# Altium PCB PCB_Final.PcbDoc (part 1 of 2)
Units mm, origin at the board's own origin, x right, y up, seen from the top; angles counter-clockwise.
Board outline 170 x 130 mm, 2 copper layers (Top Layer, Bottom Layer); 113 components, 88 nets, 409 pads, 43 vias.
Unrouted connection lines stored in the file: 10.
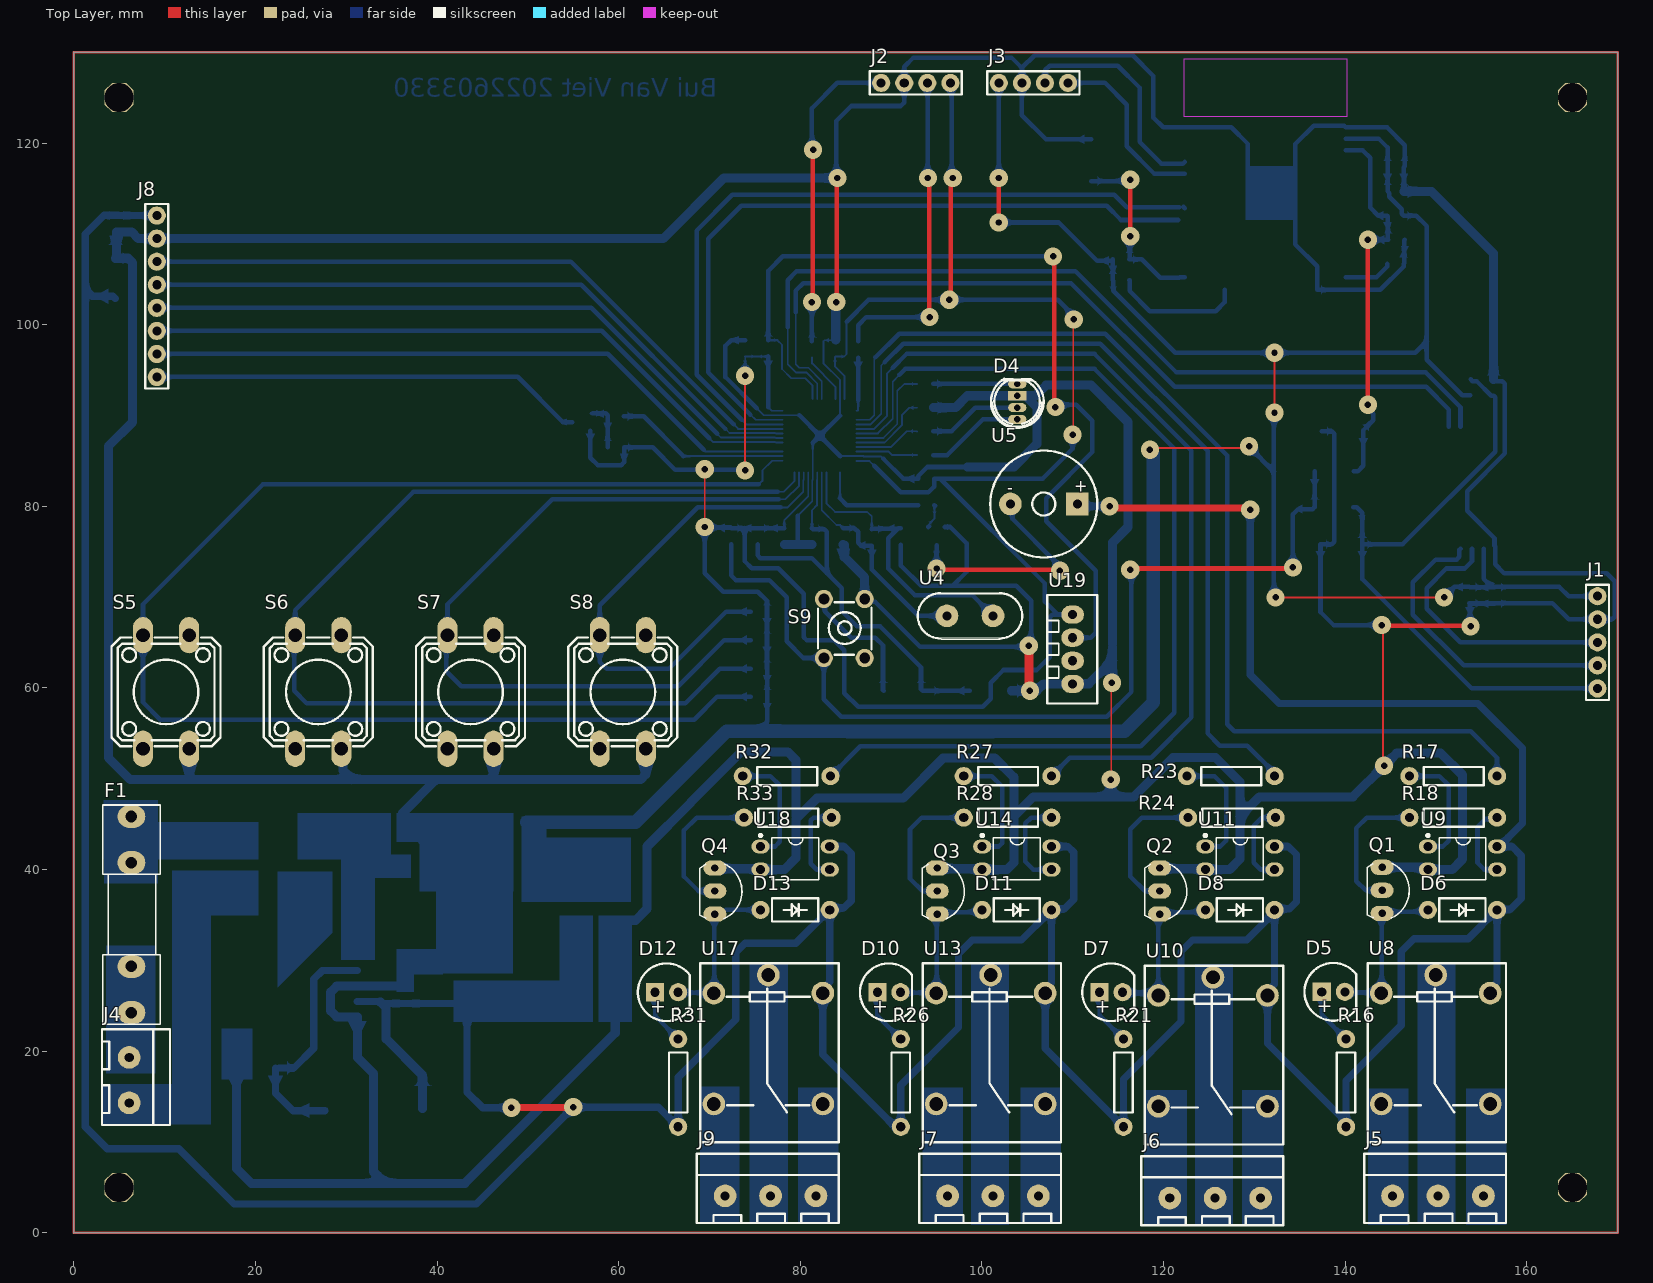
[diagram p0: Top Layer view]
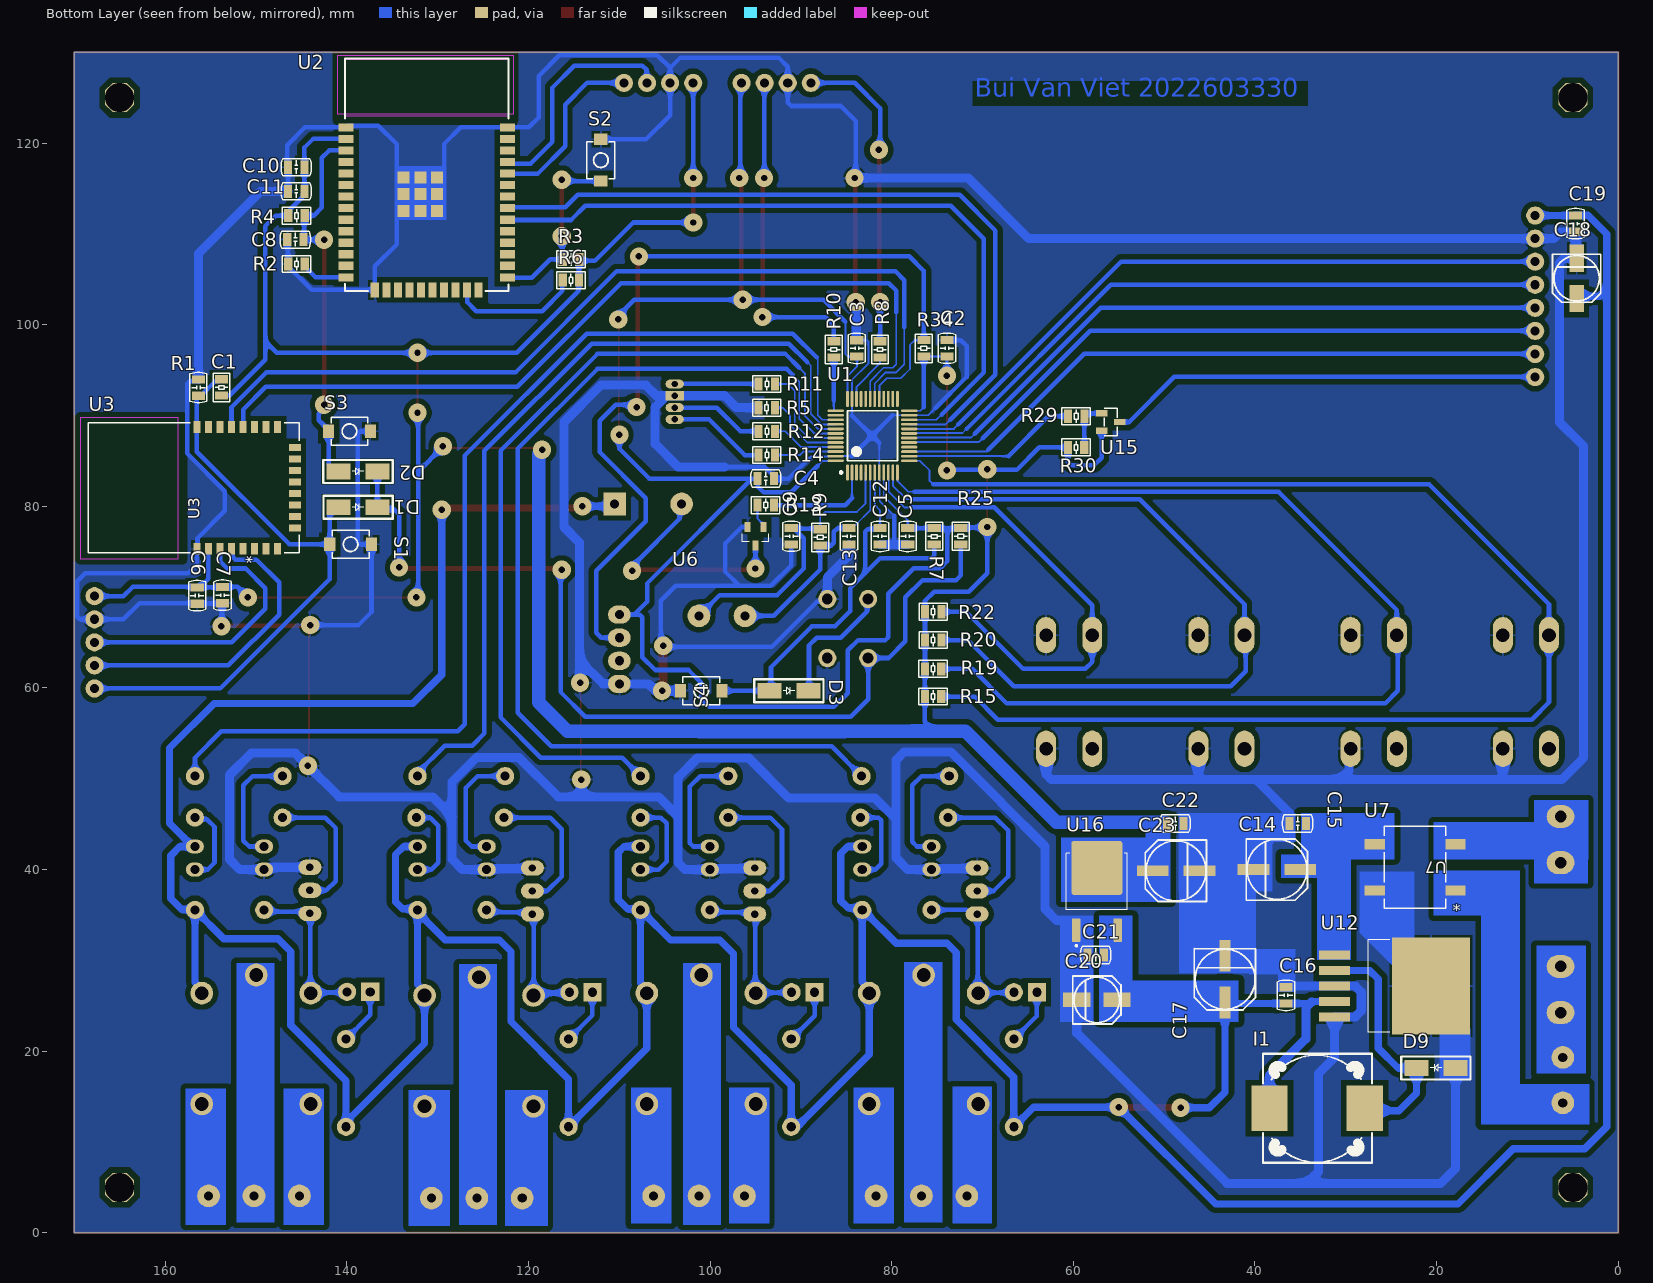
[diagram p1: Bottom Layer view, seen from below]
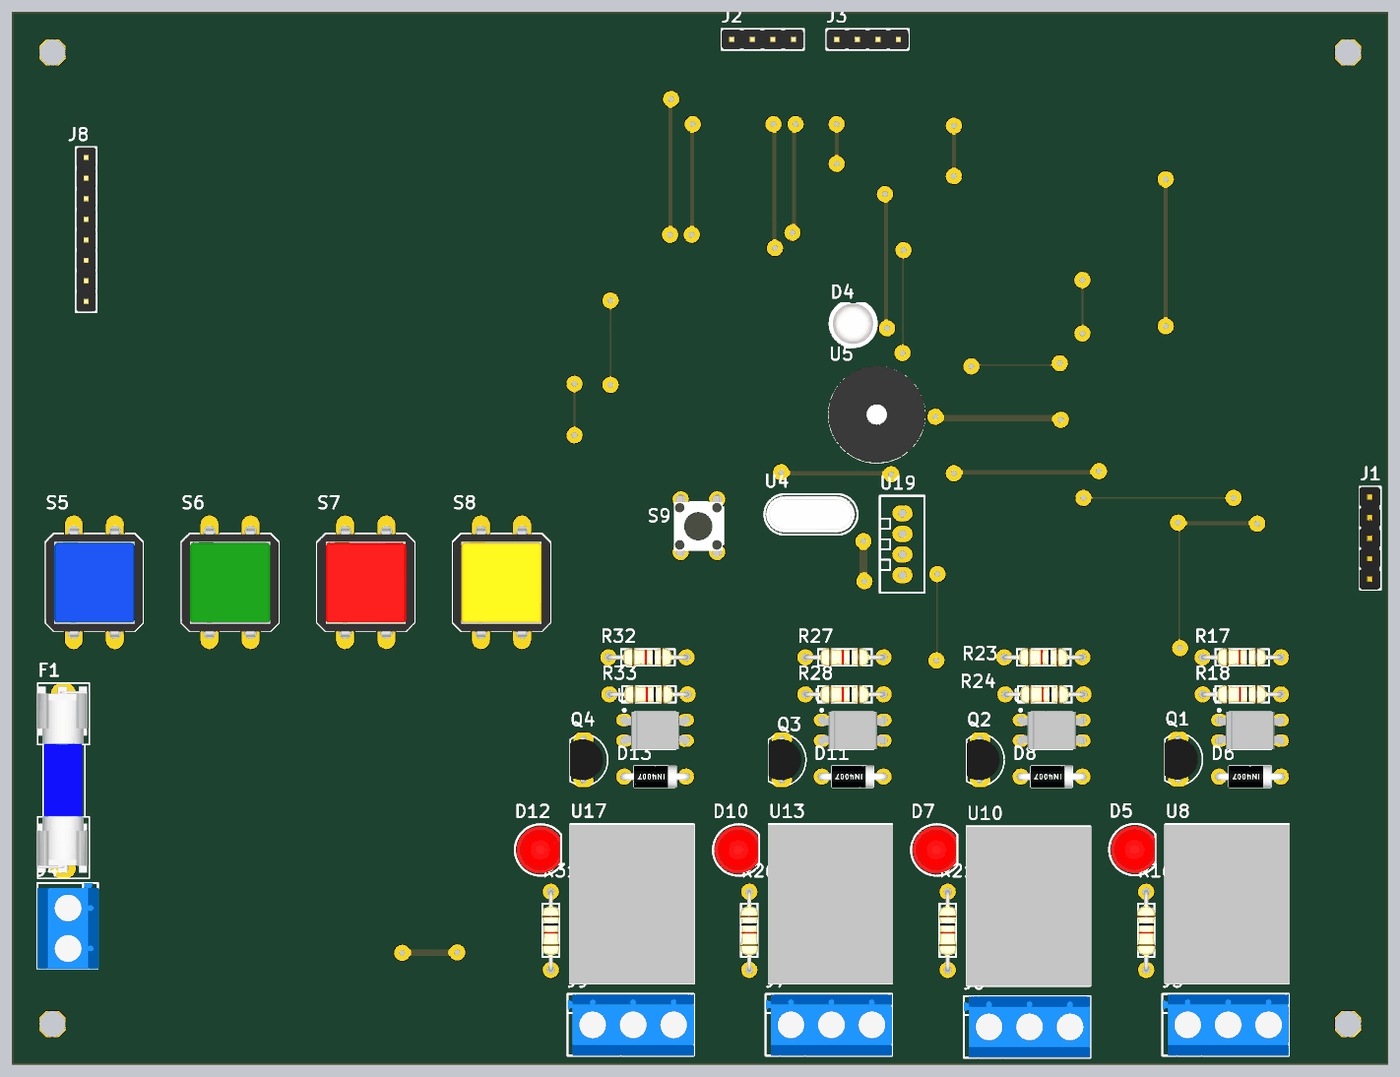
[diagram p2: 3D render of the assembled board from above, using the file's embedded part models]
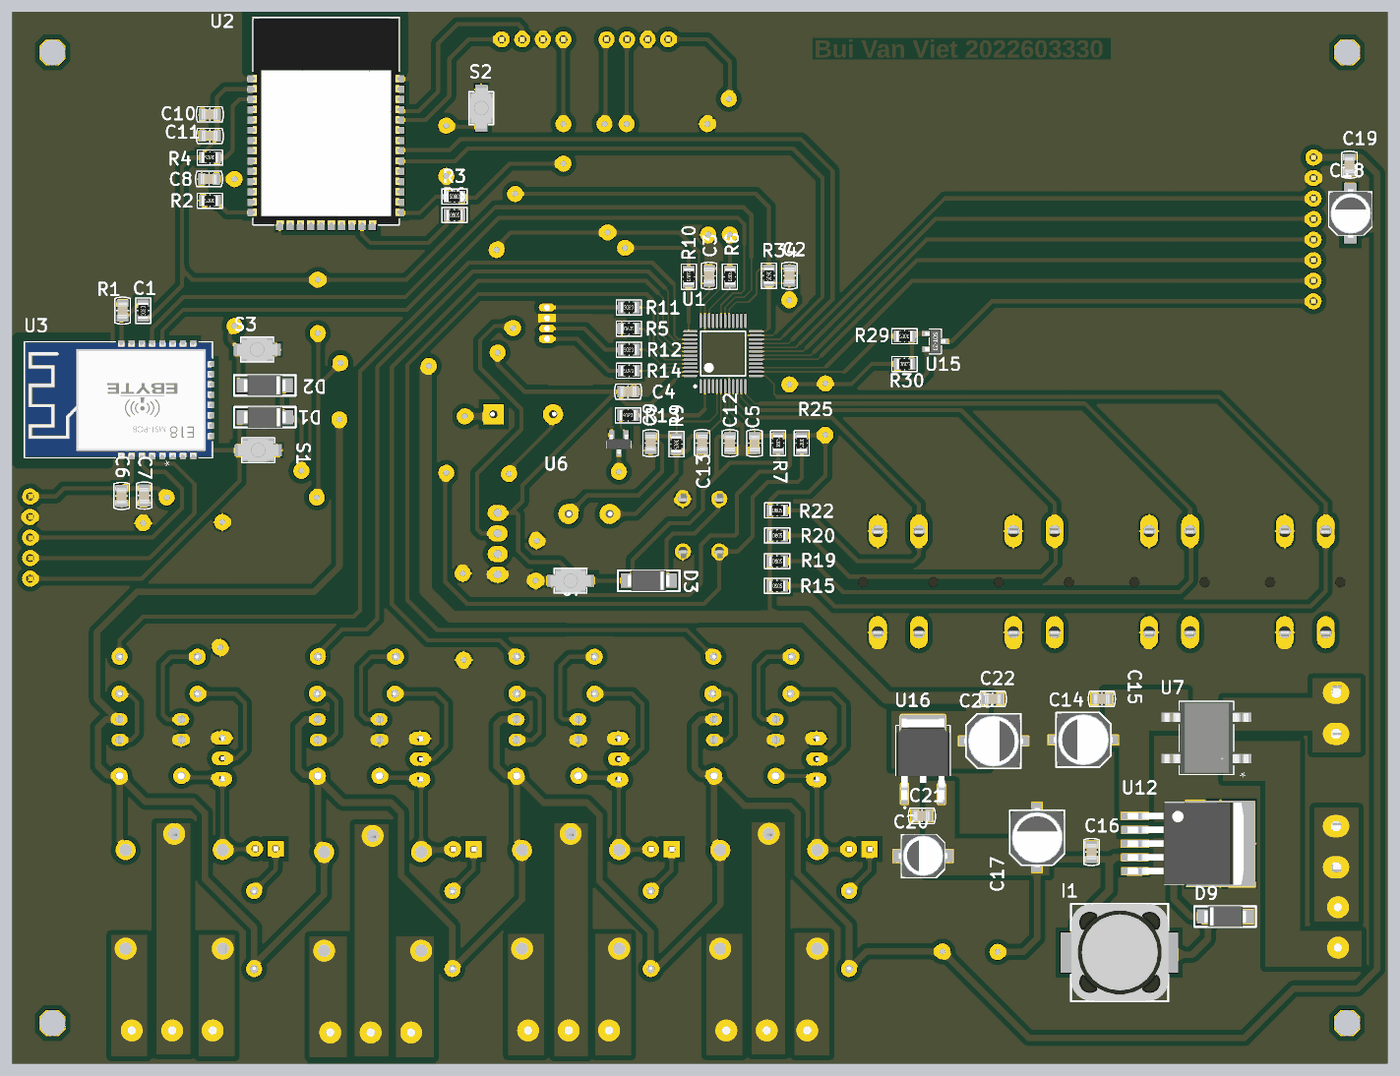
[diagram p3: 3D render of the assembled board from below, using the file's embedded part models]

## Layer stack, top to bottom
Top Solder: solder mask 0.0102, Solder Resist, Dk 3.5
Top Layer: signal copper 0.0356
Dielectric 1: dielectric 0.32, FR-4, Dk 4.8
Bottom Layer: signal copper 0.0356
Bottom Solder: solder mask 0.0102, Solder Resist, Dk 3.5

## Board outline
0,0 0,130 170,130 170,0

## Design rules (kind name [scope] priority, off if disabled: settings)
Clearance [All] p1: gap=0.2 ignorepadtopadclearanceinfootprint=FALSE except(0.6: Arc-Fill Arc-Poly Arc-Region Track-Fill Track-Poly Track-Region SMDPad-Fill SMDPad-Poly SMDPad-Region THPad-Fill THPad-Poly THPad-Region Via-Fill Via-Poly Via-Region Fill-Fill Fill-Poly Fill-Region Poly-Poly Poly-Region Region-Region)
PolygonConnect [All] p1: connectstyle=Relief reliefconductorwidth=0.254 reliefentries=4 polygonreliefangle="90 Angle" airgapwidth=0.254
RoutingVias [All] p1: holewidth=0.711 width=2 viastyle="Through Hole" minholewidth=0.711 minwidth=2 maxholewidth=0.711 maxwidth=2
SolderMaskExpansion [All] p1: expansion=0.102 istentingtop=FALSE
SupplyNets "Schematic Supply Nets_3" [InNet('+12')] p1: voltage=0.000
SupplyNets "Schematic Supply Nets_2" [InNet('+3.3')] p2: voltage=0.000
SupplyNets "Schematic Supply Nets_1" [InNet('GND')] p3: voltage=0.000
SupplyNets "Schematic Supply Nets" [InNet('+5')] p4: voltage=0.000
Width GND [InNet('GND')] p1: maxlimit=1 minlimit=0.2 preferedwidth=0.2
Width 12V [InNet('+12')] p2: maxlimit=1 minlimit=1 preferedwidth=1
Width 5V [InNet('+5')] p3: maxlimit=1 minlimit=0.8 preferedwidth=0.8
Width 3.3V [InNet('+3.3')] p4: maxlimit=1.5 minlimit=0.2 preferedwidth=0.5
Width SIG [All] p5: maxlimit=0.5 minlimit=0.2 preferedwidth=0.2
30 further rules are at their usual default settings.

## Components (designator, comment, footprint, x,y, rotation, side; value= is the part's Value field where it differs from the comment)
C1 "100nF" "CAPACITOR 0805" 156.337,93.08 r270 bottom
C2 "100nF" "CAPACITOR 0805" 73.914,97.398 r270 bottom
C3 "100nF" "CAPACITOR 0805" 83.844,97.389 r270 bottom
C4 "100nF" "CAPACITOR 0805" 93.864,83.058 r0 bottom
C5 "100nF" "CAPACITOR 0805" 78.232,76.697 r90 bottom
C6 "100nF" "CAPACITOR 0805" 156.464,70.176 r90 bottom
C7 "10uF" "CAPACITOR 0805" 153.67,70.22 r90 bottom
C8 "100nF" "CAPACITOR 0805" 145.649,109.363 r180 bottom
C9 "100nF" "CAPACITOR 0805" 91.059,76.697 r270 bottom
C10 "100nF" "CAPACITOR 0805" 145.552,117.343 r180 bottom
C11 "10uF" "CAPACITOR 0805" 145.552,114.681 r180 bottom
C12 "CAPACITOR 0805" "CAPACITOR 0805" 81.28,76.697 r90 bottom
C13 "100nF" "CAPACITOR 0805" 84.709,76.697 r270 bottom
C14 "220uF/16V" ALUMINUM_7mm 37.592,40.005 r270 bottom
C15 "100nF" "CAPACITOR 0805" 35.295,45.085 r180 bottom
C16 "100nF" "CAPACITOR 0805" 36.576,26.151 r270 bottom
C17 "220uF" ALUMINUM_7mm 43.307,27.94 r0 bottom
C18 "47uF" ALUMINUM_5mm 4.572,105.102 r0 bottom
C19 "100nF" "CAPACITOR 0805" 4.699,111.125 r90 bottom
C20 "47uF" ALUMINUM_5mm 57.404,25.654 r270 bottom
C21 "100nF" "CAPACITOR 0805" 57.531,30.607 r180 bottom
C22 "100nF" "CAPACITOR 0805" 48.779,45.085 r0 bottom
C23 "220uF" ALUMINUM_7mm 48.681,39.878 r90 bottom
D1 "M7" DIODE_SMA 138.749,79.901 r270 bottom
D2 "M7" DIODE_SMA 138.767,83.838 r270 bottom
D3 "M7" DIODE_SMA 91.313,59.69 r270 bottom
D4 "LED_RGB" LED_RGB_5mm 103.886,91.522 r270 top
D5 "LED_5mm_RED" LED_5mm_RED 138.684,26.543 r0 top
D6 "1N4007" 1N4007 152.896,35.56 r270 top
D7 "LED_5mm_RED" LED_5mm_RED 114.215,26.498 r0 top
D8 "1N4007" 1N4007 128.397,35.56 r270 top
D9 "SS34" DIODE_SMA 20.057,18.161 r90 bottom
D10 "LED_5mm_RED" LED_5mm_RED 89.747,26.498 r0 top
D11 "1N4007" 1N4007 103.833,35.56 r270 top
D12 "LED_5mm_RED" LED_5mm_RED 65.278,26.498 r0 top
D13 "1N4007" 1N4007 79.427,35.56 r270 top
F1 "F1A" Fuse 6.35,35.052 r90 top value=Fuse
I1 "1260" 1260 33.147,13.716 r0 bottom
J1 "CC DEBUGGER" MALE-2.54-5P 167.767,65.024 r0 top
J2 "ST LINK" MALE-2.54-4P 92.71,126.619 r270 top
J3 "USB TTL" MALE-2.54-4P 105.664,126.619 r90 top
J4 "12AC" BORNE-5.00-2P 6.858,17.145 r180 top
J5 "BORNE-5.00-3P" BORNE-5.00-3P 149.892,4.897 r270 top
J6 "BORNE-5.00-3P" BORNE-5.00-3P 125.36,4.643 r270 top
J7 "BORNE-5.00-3P" BORNE-5.00-3P 100.891,4.897 r270 top
J8 "TFT 2.8inh" MALE-2.54-8P 9.144,103.124 r180 top
J9 "BORNE-5.00-3P" BORNE-5.00-3P 76.401,4.897 r270 top
Q1 "C9014" QTO-92 144.054,37.719 r270 top
Q2 "C9014" QTO-92 119.564,37.643 r270 top
Q3 "C9014" QTO-92 95.074,37.643 r270 top
Q4 "C9014" QTO-92 70.584,37.643 r270 top
R1 "RESISTOR_0805" RESISTOR_0805 153.797,93.091 r270 bottom
R2 "10K" RESISTOR_0805 145.531,106.68 r0 bottom
R3 "10K" RESISTOR_0805 115.305,107.188 r0 bottom
R4 "RESISTOR_0805" RESISTOR_0805 145.531,112.004 r0 bottom
R5 "RESISTOR_0805" RESISTOR_0805 93.759,90.86 r180 bottom
R6 "10K" RESISTOR_0805 115.316,104.902 r180 bottom
R7 "RESISTOR_0805" RESISTOR_0805 75.311,76.697 r90 bottom
R8 "33" RESISTOR_0805 81.28,97.271 r90 bottom
R9 "RESISTOR_0805" RESISTOR_0805 87.867,76.582 r270 bottom
R10 "33" RESISTOR_0805 86.36,97.271 r90 bottom
R11 "220" RESISTOR_0805 93.746,93.472 r0 bottom
R12 "220" RESISTOR_0805 93.746,88.254 r0 bottom
R13 "1K" RESISTOR_0805 93.864,80.137 r0 bottom
R14 "220" RESISTOR_0805 93.746,85.646 r0 bottom
R15 "RESISTOR_0805" RESISTOR_0805 75.438,59.055 r180 bottom
R16 "220" RESISTOR_PTH_9.5mm 140.081,16.51 r270 top
R17 "1K" RESISTOR_PTH_9.5mm 151.88,50.292 r180 top
R18 "1K" RESISTOR_PTH_9.5mm 151.892,45.72 r180 top
R19 "RESISTOR_0805" RESISTOR_0805 75.438,62.103 r180 bottom
R20 "RESISTOR_0805" RESISTOR_0805 75.427,65.278 r180 bottom
R21 "220" RESISTOR_PTH_9.5mm 115.57,16.51 r270 top
R22 "RESISTOR_0805" RESISTOR_0805 75.427,68.389 r180 bottom
R23 "1K" RESISTOR_PTH_9.5mm 127.381,50.292 r180 top
R24 "1K" RESISTOR_PTH_9.5mm 127.508,45.72 r180 top
R25 "RESISTOR_0805" RESISTOR_0805 72.39,76.708 r270 bottom
R26 "220" RESISTOR_PTH_9.5mm 91.059,16.51 r270 top
R27 "1K" RESISTOR_PTH_9.5mm 102.817,50.292 r180 top
R28 "1K" RESISTOR_PTH_9.5mm 102.817,45.72 r180 top
R29 "220" RESISTOR_0805 59.679,89.916 r0 bottom
R30 "10K" RESISTOR_0805 59.69,86.487 r180 bottom
R31 "220" RESISTOR_PTH_9.5mm 66.548,16.51 r270 top
R32 "1K" RESISTOR_PTH_9.5mm 78.486,50.292 r180 top
R33 "1K" RESISTOR_PTH_9.5mm 78.613,45.72 r180 top
R34 "10K" RESISTOR_0805 76.454,97.398 r270 bottom
S1 "PUSH_BUTTON_SMD_3X4X2" PUSH_BUTTON_SMD_3X4X2 139.573,75.819 r0 bottom
S2 "PUSH_BUTTON_SMD_3X4X2" PUSH_BUTTON_SMD_3X4X2 112.014,118.11 r90 bottom
S3 "PUSH_BUTTON_SMD_3X4X2" PUSH_BUTTON_SMD_3X4X2 139.7,88.265 r0 bottom
S4 "PUSH_BUTTON_SMD_3X4X2" PUSH_BUTTON_SMD_3X4X2 100.965,59.69 r180 bottom
S5 "PUSH_BUTTON_12X12" PUSH_BUTTON_12X12_BLUE 10.16,59.563 r90 top
S6 "PUSH_BUTTON_12X12" PUSH_BUTTON_12X12_GREEN 26.924,59.563 r90 top
S7 "PUSH_BUTTON_12X12" PUSH_BUTTON_12X12_RED 43.688,59.563 r90 top
S8 "PUSH_BUTTON_12X12" PUSH_BUTTON_12X12_YELLOW 60.452,59.563 r90 top
S9 "PUSH_BUTTON_6X6" PUSH_BUTTON_6X6 84.836,66.548 r270 top
U1 "STM32F103C8T6" STM-LQFP48_N 82.116,87.775 r90 bottom
U2 "ESP32-WROOM-32D" ESP32-WROOM-32D 131.187,112.779 r180 bottom
U3 "E18-MS1-PCB" E18-MS1-PCB_BYT 156.845,82.042 r90 bottom
U4 "8 MHz" CRISTAL_16Mhz 98.679,67.945 r0 top
U5 "BUZZER" BUZZER_12mm 106.812,80.264 r0 top
U6 "J3Y" J3Y 94.996,76.708 r0 bottom
U7 "DB107S" SOIC_B107S_RTN 22.365,40.249 r0 bottom
U8 "RELE" RELE 150.082,19.83 r270 top
U9 "PC817" PC817_DIP 152.908,41.272 r270 top
U10 "RELE" RELE 125.55,19.576 r270 top
U11 "PC817" PC817_DIP 128.397,41.272 r270 top
U12 "LM2596" LM2596 24.892,27.178 r0 bottom
U13 "RELE" RELE 101.081,19.83 r270 top
U14 "PC817" PC817_DIP 103.833,41.272 r270 top
U15 "AP3P080N" SOT23-3 55.88,89.281 r0 bottom
U16 "AMS1117 TO-252" DPAK457P1010X238-3N 57.404,37.592 r180 bottom
U17 "RELE" RELE 76.592,19.83 r270 top
U18 "PC817" PC817_DIP 79.427,41.272 r270 top
U19 "DHT11" DHT11 109.982,64.262 r180 top

## Footprints (in the part's own frame and the unit in brackets; to place one, negate y for a bottom-side part, rotate by r counter-clockwise, add the part's x,y. Pads: shape width x height; smd on the part's side, far side on the other; paste and mask are expansions set on the pad)
1N4007 [mm] "Rectifier Diode 1000V 1A DO-41"
  round 2 hole 1: 1(0,-3.81) 2(0,3.81)
  silkscreen extent -1.27,-2.54 1.27,2.54, body extent -1.35,-4.24 1.35,4.24, height 3.35
1260 [mm]
  rect 4x5 smd: 1(-5.25,0) 2(5.25,0)
  silkscreen extent -6.04,-6 5.96,6, body extent -6.07,-6.02 5.93,5.98, height 7.46
ALUMINUM_5mm [mm] "ALUMINUM CAPACITOR 5mm"
  rect 1.6x3 smd: 1(0,2.213) 2(0,-2.213)
  silkscreen extent -2.64,-2.66 2.66,2.64, body extent -2.67,-2.99 2.63,3.01, height 5.81
ALUMINUM_7mm [mm] "ALUMINUM CAPACITOR 7mm"
  rect 1.2x3.5 smd: 1(0,2.58) 2(0,-2.58)
  silkscreen extent -3.38,-3.36 3.38,3.4, body extent -3.32,-3.64 3.28,3.66, height 5.8
BORNE-5.00-2P [mm]
  round 2.5 hole 1: 1(0.754,2.82) 2(0.754,-2.18)
  silkscreen extent -3.75,-5.27 3.75,5.27, body extent -3.86,-5.28 3.74,5.32, height 10.1
BORNE-5.00-3P [mm]
  round 2.5 hole 1: 1(0.815,5.318) 2(0.815,0.318) 3(0.815,-4.683)
  silkscreen extent -3.8,-7.81 3.8,7.81, body extent -3.8,-7.79 3.8,7.81, height 10.1
BUZZER_12mm [mm] "BUZZER MAGNETIC 12MM"
  rect 2.5x2.5 hole 1: 1(3.688,0)
  round 2.5 hole 1: 2(-3.688,0)
  silkscreen extent -5.9,-5.9 5.89,5.88, body extent -6,-5.98 5.99,6.02, height 9.51
"CAPACITOR 0805" [mm]
  rect 0.9x1.45 smd: 1(-0.9,0) 2(0.9,0)
  silkscreen extent -1.68,-0.95 1.67,0.95, body extent -1.03,-0.62 0.97,0.63, height 0.61
CRISTAL_16Mhz [mm] "CRYSTAL 16MHZ PTH"
  round 2.5 hole 1: 1(-2.54,0) 2(2.54,0)
  silkscreen extent -5.75,-2.56 5.75,2.56, body extent -5.56,-2.24 5.44,2.26, height 3.55
DHT11 [mm] "SENSOR HUMIDITY/TEMPERATURE"
  oval 2.5x2 hole 1: 1(0,-3.81) 2(0,-1.27) 3(0,1.27) 4(0,3.81)
  silkscreen extent -2.71,-5.97 2.79,5.97, body extent -2.71,-6 2.79,6, height 15.5
DIODE_SMA [mm] "Diode SMA"
  rect 1.75x2.65 smd: 1(0,-2.15) 2(0,2.15)
  silkscreen extent -1.27,-3.8 1.27,3.82, body extent -1.3,-2.6 1.3,2.6, height 2.2
DPAK457P1010X238-3N [mm]
  rrect25% 0.95x2.59 smd: 1(-2.286,-4.26) 3(2.286,-4.26)
  rrect10% 5.63x5.94 smd: 2(0,2.59)
  silkscreen extent -3.35,-6.07 3.35,4.19, body extent -3.3,-5.05 3.3,5.05, height 2.2
E18-MS1-PCB_BYT [mil]
  rect 51x30 smd paste+0 mask+0: 1(-264,-13.78) 2(-264,-63.78) 3(-264,-113.78) 4(-264,-163.78) 5(-264,-213.78) 6(-264,-263.78) 7(-264,-313.78) 8(-264,-363.78) 17(264,-363.78) 18(264,-313.78) 19(264,-263.78) 20(264,-213.78) 21(264,-163.78) 22(264,-113.78) 23(264,-63.78) 24(264,-13.78)
  rect 30x51 smd paste+0 mask+0: 9(-175,-439.5) 10(-125,-439.5) 11(-75,-439.5) 12(-25,-439.5) 13(25,-439.5) 14(75,-439.5) 15(125,-439.5) 16(175,-439.5)
  silkscreen extent -282,-458 282,458, body extent -280,-455 280,453, height 94
ESP32-WROOM-32D [mm] "Chip SMD 39 Pads 18x25.5mm w/ Antenna."
  rect 1.65x0.9 smd: 1(-8.875,8.943) 2(-8.875,7.673) 3(-8.875,6.403) 4(-8.875,5.133) 5(-8.875,3.863) 6(-8.875,2.593) 7(-8.875,1.323) 8(-8.875,0.053) 9(-8.875,-1.217) 10(-8.875,-2.487) 11(-8.875,-3.757) 12(-8.875,-5.027) 13(-8.875,-6.297) 14(-8.875,-7.567) 25(8.875,-7.567) 26(8.875,-6.297) 27(8.875,-5.027) 28(8.875,-3.757) 29(8.875,-2.487) 30(8.875,-1.217) 31(8.875,0.053) 32(8.875,1.323) 33(8.875,2.593) 34(8.875,3.863) 35(8.875,5.133) 36(8.875,6.403) 37(8.875,7.673) 38(8.875,8.943)
  rect 0.9x1.65 smd: 15(-5.72,-8.942) 16(-4.45,-8.942) 17(-3.18,-8.942) 18(-1.91,-8.942) 19(-0.64,-8.942) 20(0.63,-8.942) 21(1.9,-8.942) 22(3.17,-8.942) 23(4.44,-8.942) 24(5.71,-8.942)
  rect 1.33x1.33 smd: 39(-2.544,-0.244) 39(-2.544,1.591) 39(-2.544,3.426) 39(-0.709,-0.244) 39(-0.709,1.591) 39(-0.709,3.426) 39(1.126,-0.244) 39(1.126,1.591) 39(1.126,3.426)
  Keep-Out Layer region: -9.004,16.471 8.996,16.471 8.996,10.171 -9.004,10.171
  silkscreen extent -9,-9.07 9,16.54, body extent -9.03,-9.05 9.04,16.49, height 3
Fuse [mil] "De Fuse"
  oval 100x120 hole 50: 1(-425,0) 1(-225,0) 2(225,0) 2(425,0)
  silkscreen extent -475,-125 475,125, body extent -448,-117 459,127, height 378
J3Y [mil] "SOT-23-3"
  rect 25x45 smd: 1(-35,-40) 2(35,-40) 3(0,40)
  silkscreen extent -58,-10 58,25, body extent -57,-42 57,52, height 49
LED_5mm_RED [mm]
  rect 2x2 hole 1: 1(-1.27,0)
  round 2 hole 1: 2(1.27,0)
  silkscreen extent -3.17,-3.17 2.54,3.17, body extent -2.94,-2.9 2.45,2.9, height 8.72
LED_RGB_5mm [mm]
  oval 1x2 hole 0.7: 1(-1.95,0) 3(0.65,0) 4(1.95,0)
  rect 1x2 hole 0.7: 2(-0.65,0)
  silkscreen extent -2.51,-2.9 2.95,2.9, body extent -2.47,-2.96 2.97,2.94, height 8.95
LM2596 [mm] "TO-263-5"
  rect 3.4x1 smd paste-3 mask+0: 1(6.33,-3.4) 2(6.33,-1.7) 3(6.33,0) 4(6.33,1.7) 5(6.33,3.4)
  rect 8.6x10.7 smd paste-6 mask+0: 6(-4.27,0)
  silkscreen extent 0.25,-5.08 2.64,5.08, body extent -7.11,-5.08 7.24,5.08, height 4.65
MALE-2.54-4P [mm]
  round 2 hole 1: 1(0,-3.81) 2(0,-1.27) 3(0,1.27) 4(0,3.81)
  silkscreen extent -1.27,-5.08 1.27,5.07, body extent -1.21,-5.09 1.19,5.07, height 8.36
MALE-2.54-5P [mm]
  round 2 hole 1: 1(0,-5.08) 2(0,-2.54) 3(0,0) 4(0,2.54) 5(0,5.08)
  silkscreen extent -1.27,-6.35 1.27,6.34, body extent -1.33,-6.36 1.21,6.34, height 8.89
MALE-2.54-8P [mm]
  round 2 hole 1: 1(0,-8.89) 2(0,-6.35) 3(0,-3.81) 4(0,-1.27) 5(0,1.27) 6(0,3.81) 7(0,6.35) 8(0,8.89)
  silkscreen extent -1.27,-10.16 1.27,10.16, body extent -1.21,-10.17 1.19,10.15, height 8.36
PC817_DIP [mm] "DIP-4"
  oval 1.524x2 hole 1: 1(-1.27,-3.81) 2(1.27,-3.81) 3(1.27,3.81) 4(-1.27,3.81)
  silkscreen extent -2.63,-3.96 2.38,2.58, body extent -2.27,-3.93 2.31,3.95, height 4.16
PUSH_BUTTON_6X6 [mm]
  round 2 hole 1.2: 1(-3.25,-2.25) 1(3.25,-2.25) 2(-3.25,2.25) 2(3.25,2.25)
  silkscreen extent -2.9,-2.9 2.9,3, body extent -3.94,-3.07 4.07,2.93, height 6.8
PUSH_BUTTON_12X12_BLUE [mm]
  oval 4x2.2 hole 1.5: 1(-6.251,2.54) 1(6.251,2.54) 2(-6.251,-2.54) 2(6.251,-2.54)
  silkscreen extent -5.99,-6 5.99,6, body extent -6.77,-6.01 6.65,6, height 8.84
PUSH_BUTTON_12X12_GREEN [mm]
  oval 4x2.2 hole 1.5: 1(-6.251,2.54) 1(6.251,2.54) 2(-6.251,-2.54) 2(6.251,-2.54)
  silkscreen extent -5.99,-6 5.99,6, body extent -6.77,-6.01 6.65,6, height 8.84
PUSH_BUTTON_12X12_RED [mm]
  oval 4x2.2 hole 1.5: 1(-6.251,2.54) 1(6.251,2.54) 2(-6.251,-2.54) 2(6.251,-2.54)
  silkscreen extent -5.99,-6 5.99,6, body extent -6.77,-6.01 6.65,6, height 8.84
PUSH_BUTTON_12X12_YELLOW [mm]
  oval 4x2.2 hole 1.5: 1(-6.251,2.54) 1(6.251,2.54) 2(-6.251,-2.54) 2(6.251,-2.54)
  silkscreen extent -5.99,-6 5.99,6, body extent -6.77,-6.01 6.65,6, height 8.84
PUSH_BUTTON_SMD_3X4X2 [mm]
  rect 1.23x1.5 smd: 1(-2.3,0) 2(2.3,0)
  silkscreen extent -2.03,-1.54 2.03,1.54, body extent -2.49,-1.45 2.51,1.45, height 2
QTO-92 [mil] "TO-92"
  oval 66x100 hole 32: 1(-100,0) 2(0,0) 3(100,0)
  silkscreen extent -117,-65 120,118, body extent -109,-66 109,95, height 245
RELE [mm]
  round 2.5 hole 1.5: 1(-6.565,5.88) 2(-6.565,-6.12) 3(-8.565,-0.12) 4(5.635,5.88) 5(5.635,-6.12)
  silkscreen extent -9.84,-7.62 9.84,7.62, body extent -9.74,-7.7 9.86,7.7, height 15.5
RESISTOR_0805 [mm]
  rect 0.9x1.45 smd: 1(-0.9,0) 2(0.9,0)
  silkscreen extent -1.56,-0.93 1.57,0.93, body extent -0.98,-0.64 1.02,0.61, height 0.46
RESISTOR_PTH_9.5mm [mm]
  round 2 hole 1: 1(-4.826,0) 2(4.826,0)
  silkscreen extent -3.36,-1.02 3.24,1.02, body extent -5,-1.11 5,1.11, height 2.61
SOIC_B107S_RTN [mm]
  rect 2.224x1.142 smd paste+0 mask+0: 1(-4.432,2.55) 2(-4.432,-2.55) 3(4.432,-2.55) 4(4.432,2.55)
  silkscreen extent -3.38,-4.52 3.38,4.52, body extent -5.19,-4.39 5.19,4.39, height 3.41
SOT23-3 [mm]
  rect 1.25x0.7 smd paste+0 mask+0.051: D(-1,0) G(1,-0.95) S(1,0.95)
  silkscreen extent -0.73,-1.53 0.73,1.53, body extent -1.25,-1.5 1.25,1.5, height 1.1
STM-LQFP48_N [mm] "QFP, 48-Leads, Body 7x7mm, Pitch 0.5mm, IPC Medium Density"
  oval 1.8x0.3 smd: 1(-4.05,2.75) 2(-4.05,2.25) 3(-4.05,1.75) 4(-4.05,1.25) 5(-4.05,0.75) 6(-4.05,0.25) 7(-4.05,-0.25) 8(-4.05,-0.75) 9(-4.05,-1.25) 10(-4.05,-1.75) 11(-4.05,-2.25) 12(-4.05,-2.75) 25(4.05,-2.75) 26(4.05,-2.25) 27(4.05,-1.75) 28(4.05,-1.25) 29(4.05,-0.75) 30(4.05,-0.25) 31(4.05,0.25) 32(4.05,0.75) 33(4.05,1.25) 34(4.05,1.75) 35(4.05,2.25) 36(4.05,2.75)
  oval 0.3x1.8 smd: 13(-2.75,-4.05) 14(-2.25,-4.05) 15(-1.75,-4.05) 16(-1.25,-4.05) 17(-0.75,-4.05) 18(-0.25,-4.05) 19(0.25,-4.05) 20(0.75,-4.05) 21(1.25,-4.05) 22(1.75,-4.05) 23(2.25,-4.05) 24(2.75,-4.05) 37(2.75,4.05) 38(2.25,4.05) 39(1.75,4.05) 40(1.25,4.05) 41(0.75,4.05) 42(0.25,4.05) 43(-0.25,4.05) 44(-0.75,4.05) 45(-1.25,4.05) 46(-1.75,4.05) 47(-2.25,4.05) 48(-2.75,4.05)
  silkscreen extent -4.17,-2.75 2.75,3.58, body extent -3.5,-3.5 3.5,3.5, height 1.6

## Part data
C1 C2 C3 C4 C5 C6 C7 C8 C9 C10 C11 C13 C15 C16 C19 C21 C22: library part "CAPACITOR 0805", "Generic Capacitor 0805, 2x1.25x1.4mm."
C12: "Generic Capacitor 0805, 2x1.25x1.4mm."
C14: "Aluminum Capacitor 220uF/16V 7mm"
C17 C23: library part 220uF/16V, "Aluminum Capacitor 220uF/16V 7mm"
C18 C20: library part 47uF/16V, "Aluminum Capacitor 47uF/16V 5mm"
D1 D2 D3: "Rectifiers Diode 1000V 1A SMA", JLCPCB PN=C330214, ComponentLink1Description=Datasheet, Digikey PN=3191-M7CT-ND, Mouser PN=637-M7
D4: library part LED_RGB_5mm, "LED RGB 4 Pins 5mm Common Cathode.", JLCPCB PN=C2837021
D5 D7 D10 D12: "LED PTH 5mm Red."
D6 D8 D11 D13: "Rectifier Diode 1000V 1A DO-41", JLCPCB PN=C3033995, ComponentLink1Description=Datasheet, ComponentLink1URL=https://www.mouser.com/datasheet/2/849/1n4001-2577232.pdf, Digikey PN=4617-1N4007TB-ND, Mouser PN=637-1N4007
D9: "Rectifier Schottky 40V 3A SMA", JLCPCB=C2909963, ComponentLink1Description=Datasheet, Digikey PN=SS34FSTR-ND, Mouser PN=512-SS34
F1: library part Fuse, "Fuse", Designed by=VanDungEvn
I1: "Generic Encapsulated Inductor 1260."
J1: library part MALE-2.54-5P, "Male Header Connector 2.54mm 5 Pins.", JLCPCB PN=C492404
J2 J3: library part MALE-2.54-4P, "Male Header Connector 2.54mm 4 Pins.", JLCPCB PN=C492403
J4: library part BORNE-5.00-2P, "Borne 2 Vias, Pitch 5mm.", JLCPCB PN=C91153
J5 J6 J7 J9: "Borne 3 Vias, Pitch 5mm.", JLCPCB PN=C91154
J8: library part MALE-2.54-8P, "Male Header Connector 2.54mm 8 Pins.", JLCPCB  PN=C492407
Q1 Q2 Q3 Q4: library part NPN_EBC, "P 600mW, EBC"
R1 R4 R5 R7 R9 R15 R19 R20 R22 R25: "Generic Resistor 0805."
R2 R3 R6 R8 R10 R11 R12 R13 R14 R29 R30 R34: library part RESISTOR_0805, "Generic Resistor 0805."
R16 R17 R18 R21 R23 R24 R26 R27 R28 R31 R32 R33: library part RESISTOR_9.5mm, "Generic Resistor 9.5mm."
S1 S2 S3 S4: "Push Button Tactile Switch SMD 2 Pins 3x4x2mm.", JLCPCB PN=C231644
S5 S6 S7 S8: "Push Button Tactile Switch PTH 4 Pins 12x12mm.", JLCPCB PN=C84931, Mouser PN=992-BUTT-12-5
S9: "Push Button Tactile Switch PTH 4 Pins 6x6mm.", JLCPCB PN=C255811
U1: "ARM Cortex-M3 32-bit MCU, 64 KB Flash, 20 KB Internal RAM, 37 I/Os, 48-pin LQFP, -40 to 85 degC, Tray", I/Os (High Current)=37, Operating Frequency(F) (Processor speed) (MHz)=72, Supplier Part Number 1=497-6063-ND, Supply Voltage(Vcc) min (V)=2, A/D Converter="2x12-bit (10 Channel)", ComponentLink1Description="Manufacturer URL", ComponentLink1URL=http://www.st.com/web/en/home.html, ComponentLink2Description=Datasheet, ComponentLink2URL=http://www.st.com/st-web-ui/static/active/en/resource/technical/document/datasheet/CD00161566.pdf, ComponentLink3Description="Package Specification", ComponentLink3URL=http://www.st.com/st-web-ui/static/active/en/resource/technical/document/datasheet/DM00058181.pdf, Core="ARM Cortex-M3", DatasheetVersion="Rev. 16", FLASH Size (Prog) (kB)=64, Internal RAM Size (kB)=20, Mounting Technology="Surface Mount", PackageDescription="48-Pin Low Profile Quad Flat Package, 7 x 7 mm Body, 0.5 mm Pitch", PackageReference=LQFP48, PackageVersion="Rev. 6, 06/2013", Packing=Tray, PartNumber=STM32F103C8T6, Supplier 1=Digi-Key, Supplier 2=Farnell, Supplier 3=Newark, Supplier 4=Newark, Supplier 5=Mouser, Supplier Part Number 2=1447637, Supplier Part Number 3=59M2182, Supplier Part Number 4=57P1222, Supplier Part Number 5=511-STM32F103C8T6
U2: "Chip SMD 39 Pads Wifi 2.4GHz BLE 4.2 18x25.5mm w/ Antenna.", JLCPCB PN=C82899, ComponentLink1Description=Datasheet, ComponentLink1URL=https://www.mouser.com/datasheet/2/891/esp32_wroom_32d_esp32_wroom_32u_datasheet_en-1365844.pdf, Digikey PN=1965-ESP32-WROOM-32D-N8CT-ND, Mouser PN=ESP32-WROOM-32D-N4
U3: "No Description Available", Manufacturer_Name="Chengdu Ebyte Elec Tech", Copyright="Copyright (C) 2026 Ultra Librarian. All rights reserved.", Manufacturer_Part_Number=E18-MS1-PCB, RefDes=RefDes, Type=Type
U4: library part CRISTAL_16Mhz, "CRYSTAL 16MHZ, PTH and SMD", Digikey PN=3155-16M20P2/49US-ND, Mouser PN=449-LFXTAL022786BULK
U5: library part BUZZER_12mm, "BUZZER MAGNETIC 12MM", JLCPCB PN=C781866, Digikey PN=433-WT-1209T-ND, Mouser PN=433-WT-1209T-ND
U6: "TRANSISTOR BIPOLAR (BJT) NPN 25V 500mA SOT-23-3", JLCPCB PN=C2828466, ComponentLink1Description=Datasheet, ComponentLink1URL=https://media.digikey.com/pdf/Data%20Sheets/UTD%20Semi%20PDFs/S8050.pdf, Digikey PN=4518-S8050CT-ND
U7: "Description", Manufacturer_Name=Rectron, Copyright="Copyright (C) 2025 Ultra Librarian. All rights reserved.", Manufacturer_Part_Number=DB107S, RefDes=RefDes, Type=Type
U8 U10 U13 U17: "Generic Rele PTH 5 Pins."
U9 U11 U14 U18: "Optocouplers Phototransistor 4 Pins, DIP and SMD.", JLCPCB PN DIP=C3008368, JLCPCB PN SMD=C3025164, ComponentLink1Description=Datasheet, ComponentLink1URL=https://www.farnell.com/datasheets/73758.pdf
U12: "IC BUCK STEP DOWN 3A TO-263-6", JLCPCB PN=C2980822, ComponentLink1Description=Datasheet, ComponentLink1URL=https://www.ti.com/lit/ds/symlink/lm2596.pdf, Digikey PN=4518-LM2596S-ADJCT-ND, Mouser PN=863-LM2596DSADJG
U15: "Mosfet PNP"
U16: library part AZ1117D-3.3TRE1, "Linear Voltage Regulator IC Positive Fixed 1 Output 1A TO-252-3", Package="TO-252-2 Diodes Inc.", Availability="In Stock", Check_prices=https://www.snapeda.com/parts/AZ1117D-3.3TRE1/Diodes+Inc./view-part/?ref=eda, MF="Diodes Inc.", MP=AZ1117D-3.3TRE1, Price=None, Purchase-URL=https://pricing.snapeda.com/search/part/AZ1117D-3.3TRE1/?ref=eda, SnapEDA_Link=https://www.snapeda.com/parts/AZ1117D-3.3TRE1/Diodes+Inc./view-part/?ref=snap
U19: "SENSOR HUMIDITY/TEMPERATURE", Digikey PN=1528-1228-ND

## Free pads (board coordinates)
  oct 3.2x3.2 hole 3.2: 5(5,5) 5(5,125) 5(165,5) 5(165,125)

## Via types
v1: diameter 2, hole 0.711, Top Layer to Bottom Layer, 43 vias

## Nets (pads, with @x,y where several pads share a name; then routed paths per layer and width w, separated by ;. In a path a pad name is that pad's centre, name@x,y a point inside that pad or via, vN(x,y) a via of type N, cw(c..) or ccw(c..) an arc to the next point about the centre after c; other vN are vias at no path point)
+3.3: C2.2 C3.2 C4.2 C5.2 C6.2 C7.2 C10.2 C11.2 C22.2 C23.1 J1.5 J2.4 J3.4 R1.2 R3.1 R4.2 R6.2 R7.2 R15.1 R19.1 R20.1 R22.1 R25.1 R30.1 R34.2 U1.9 U1.24 U1.36 U1.48 U2.2 U3.2 U15.S U16.2 U19.1 | length 577.1
  Top Layer w0.2: v1(69.469,77.724) v1(69.469,84.074) ; v1(73.914,83.947) 73.914,94.361 v1(73.923,94.37) ; v1(109.982,87.884) 110.045,87.947 110.045,100.52 v1(110.109,100.584) ; v1(118.491,86.233) 118.681,86.423 129.222,86.423 v1(129.413,86.614) ; v1(132.207,90.297) v1(132.207,96.901) ; v1(132.334,69.977) 150.622,69.977 v1@150.749,69.85
  Top Layer w0.5: v1@96.52,102.87 96.583,102.933 96.583,115.959 v1(96.774,116.15) ; v1(101.854,111.252) v1(101.854,116.15)
  Bottom Layer w0.2: C23.1 C23.1@51.308,39.831 ; v1@69.401,84.006 v1(69.469,84.074) v1@69.532,84.01 ; v1@73.85,84.01 v1(73.914,83.947) ; v1(73.923,94.37) 73.923,96.489 C2.2 R34.2 ; R19.1@76.327,62.114 R19.1 ; 76.454,90.932 76.861,90.525 U1.24 ; C5.2 78.232,78.486 80.866,81.12 U1.9 ; U1.36 84.866,94.331 83.82,95.377 83.82,96.465 C3.2 84.805,96.489 85.09,96.774 85.09,100.33 ; U1.48 86.199,84.992 87.601,84.992 88.138,84.455 ; C10.2 C10.2@144.653,117.344 ; C7.2 C7.2@153.714,71.076 ; R1.2@153.767,92.221 R1.2
  Bottom Layer w0.5: 49.679,42.65 51.261,41.068 C23.1 ; U15.S 56.88,85.36 57.713,84.527 60.27,84.527 60.59,84.847 R30.1 63.754,86.487 66.235,84.006 v1@69.401,84.006 ; v1@69.532,84.01 v1@73.85,84.01 ; 75.311,55.245 76.338,56.272 R15.1 R19.1 ; R19.1@76.327,62.114 R20.1 R22.1 76.327,69.596 75.311,70.612 71.501,70.612 69.469,72.644 v1(69.469,77.724) 69.527,77.666 72.332,77.666 R25.1 72.401,77.597 73.856,77.597 ; 76.454,90.932 R34.2 ; C5.2 R7.2 73.856,77.597 ; 85.09,100.33 87.503,102.743 v1(96.393,102.743) 108.331,102.743 110.109,100.965 v1(110.109,100.584) ; 88.138,84.455 91.059,81.534 94.107,81.534 94.723,82.15 C4.2@94.723,83.055 ; C4.2 95.631,83.058 ; J2.4 96.647,126.492 96.647,116.277 v1(96.774,116.15) ; v1(101.854,111.252) 108.458,111.252 112.669,107.041 R3.1@114.405,107.041 ; v1(101.854,116.15) J3.4 ; 108.458,68.072 U19.1 ; v1(109.982,87.884) 109.982,86.36 106.68,83.058 95.631,83.058 ; R3.1 114.41,107.183 114.41,104.908 R6.2 114.466,104.852 114.466,103.72 121.285,96.901 v1(132.207,96.901) 147.701,96.901 148.971,98.171 ; v1(129.413,86.614) 129.413,86.55 132.143,83.82 ; v1(132.207,90.297) 132.143,90.233 132.143,83.82 ; v1(132.334,69.977) 132.143,70.168 132.143,83.82 ; U2.2 143.709,120.451 144.653,119.507 C10.2@144.653,117.344 ; C10.2 C11.2 144.852,114.481 144.852,114.101 146.231,112.722 146.231,112.204 R4.2 147.828,112.003 148.971,110.86 148.971,98.171 ; v1(150.876,69.977) 152.019,71.12 C7.2 ; C7.2@153.714,71.076 C6.2 ; R1.2@153.767,92.221 152.889,92.221 148.971,96.139 148.971,98.171 ; U3.2 155.225,72.04 156.145,71.12 163.576,71.12 164.592,70.104 J1.5 ; 73.856,77.597 73.856,73.972 74.633,73.195 77.554,73.195 80.391,70.358 80.391,65.571 80.684,65.278 83.693,65.278 84.836,64.135 84.836,59.436 86.36,57.912 100.076,57.912 100.965,58.801 100.965,60.579 102.362,61.976 106.045,61.976 107.442,63.373 107.442,67.779 107.735,68.072 108.366,68.072 106.934,69.504 106.934,71.501 95.416,83.019 95.67,83.019 95.631,83.058
  Bottom Layer w1.5: C22.2@49.858,45.212 61.849,45.212 71.882,55.245 75.311,55.245 85.209,55.245 85.242,55.212 101.194,55.212 101.227,55.245 115.697,55.245 118.872,58.42 118.872,85.717 118.491,86.098 v1(118.491,86.233)
+5: C16.2 C17.1 C18.1 C19.2 C20.1 C21.2 D6.2 D8.2 D11.2 D13.2 I1.2 J8.1 R16.2 R21.2 R26.2 R31.2 U5.1 U8.1 U9.4 U10.1 U11.4 U12.4 U13.1 U14.4 U16.3 U17.1 U18.4 | length 587.2
  Top Layer w0.8: v1(48.193,13.783) 48.223,13.813 54.961,13.813 v1(54.991,13.843) ; v1@114.046,80.264 114.49,79.819 129.35,79.819 v1(129.54,79.629)
  Bottom Layer w0.8: C18.1 4.33,103.131 2.025,103.131 1.27,103.886 ; J8.1@9.153,112.023 J8.1 9.126,112.032 4.935,112.032 4.917,112.05 3.338,112.05 1.27,109.982 1.27,103.886 ; U12.4 33.654,25.478 33.704,25.428 ; 34.397,25.251 C16.2 43.198,25.251 C17.1 43.307,15.494 45.018,13.783 v1(48.193,13.783) ; I1.2 I1.2@38.464,13.783 ; C20.1@55.191,26.018 55.289,26.018 C20.1@55.652,25.654 ; D13.2 83.467,35.79 84.812,35.79 85.598,36.576 85.598,41.783 84.839,42.542 U18.4 ; U14.4 109.477,42.542 110.109,41.91 110.109,36.703 109.06,35.654 107.737,35.654 D11.2 D11.2@107.289,35.205 ; U5.1 110.754,80.01 v1(114.046,80.01) ; v1(129.54,79.629) 129.54,61.468 132.715,58.293 154.598,58.293 159.512,53.379 159.512,45.098 U9.4@156.956,42.542 ; D8.2 D8.2@132.207,35.306 ; U11.4 133.734,42.542 134.62,41.656 134.62,36.449 133.858,35.687 D8.2@132.334,35.687 ; R16.2 R16.2@140.081,12.192 ; U8.1@155.962,26.855 156.706,27.599 D6.2 ; U9.4 U9.4@156.956,42.542 ; 1.27,103.886 1.27,11.684 3.683,9.271 11.557,9.271 17.653,3.175 44.323,3.175 v1(54.991,13.843) 64.389,13.843 R31.2 66.548,17.145 72.898,23.495 72.898,30.861 73.914,31.877 79.502,31.877 83.185,35.56 83.237,35.508 83.237,27.62 82.472,26.855 U17.1 82.472,19.637 90.194,11.914 90.829,11.914 R26.2 91.059,16.256 97.409,22.606 97.409,30.734 98.933,32.258 104.341,32.258 D11.2@107.289,35.205 ; D11.2@107.289,35.205 107.643,34.851 107.643,27.537 106.961,26.855 U13.1 106.961,20.293 R21.2 115.57,16.926 121.92,23.276 121.92,30.988 123.19,32.258 129.159,32.258 D8.2@132.207,35.306 ; D8.2@132.207,35.306 132.207,27.378 131.43,26.601 U10.1 131.43,20.843 139.579,12.694 139.579,12.51 139.898,12.192 R16.2@140.081,12.192 ; R16.2@140.081,12.192 140.081,16.764 146.177,22.86 146.177,30.988 147.574,32.385 153.531,32.385 D6.2 ; D6.2 156.758,35.611 158.166,35.611 159.385,36.83 159.385,41.531 158.373,42.542 U9.4@156.956,42.542
  Bottom Layer w1: 33.704,25.428 33.754,25.428 34.397,24.785 34.397,21.356 38.397,17.356 I1.2
+12: C14.1 C15.2 U7.3 U12.1
BOOT: R5.2 U1.44 | length 8.9
  Bottom Layer w0.2: U1.44 89.276,87.025 91.186,88.935 91.186,90.043 92.003,90.86 R5.2
BUTTON_1: R15.2 S5.1 U1.13 | length 157.2
  Bottom Layer w0.2: 75.438,82.423 75.819,82.804 75.819,83.947 76.897,85.025 U1.13
  Bottom Layer w0.5: R15.2 70.866,59.055 68.326,56.515 9.525,56.515 7.62,58.42 7.62,65.814 7.62,69.215 20.828,82.423 75.438,82.423
BUTTON_2: R19.2 S6.1 U1.12 | length 123.2
  Bottom Layer w0.2: 77.535,81.596 78.167,81.596 79.347,82.776 79.347,83.706 U1.12
  Bottom Layer w0.5: R19.2 71.12,62.103 67.31,58.293 25.654,58.293 24.257,59.69 24.257,65.687 24.384,65.814 24.384,68.58 37.4,81.596 77.535,81.596
BUTTON_3: R20.2 S7.1 U1.11 | length 89.3
  Bottom Layer w0.2: 77.597,80.772 78.356,80.772 79.866,82.282 U1.11
  Bottom Layer w0.5: R20.2 71.628,65.278 66.548,60.198 42.672,60.198 41.021,61.849 41.021,65.687 41.148,65.814 41.148,69.215 52.695,80.762 77.587,80.762 77.597,80.772
BUTTON_4: R22.2 S8.1 U1.10 | length 55.5
  Bottom Layer w0.2: 77.851,79.883 78.613,79.883 80.316,81.586 80.316,82.854 80.316,82.898 80.366,82.948 U1.10
  Bottom Layer w0.5: R22.2 71.819,68.389 65.532,62.103 58.674,62.103 57.912,62.865 57.912,65.814 57.912,69.088 68.707,79.883 77.851,79.883
BUZZER: R13.1 U1.2 | length 11.7
  Bottom Layer w0.2: 84.366,80.899 U1.2
  Bottom Layer w0.5: 84.366,80.899 85.128,80.137 R13.1
CS: J8.3 U1.20 | length 76.6
  Bottom Layer w0.2: 72.644,89.027 73.146,88.525 U1.20
  Bottom Layer w0.5: J8.3 9.162,106.952 54.719,106.952 72.644,89.027
DATA_DHT: R34.1 U1.29 U19.2 | length 101.7
  Top Layer w0.5: v1(107.823,107.516) 107.95,107.389 107.95,91.059 v1(108.077,90.932)
  Bottom Layer w0.2: R34.1 77.47,98.298 77.978,97.79 77.978,95.123 78.994,94.107 80.518,94.107 81.347,93.278 81.347,91.844 U1.29
  Bottom Layer w0.5: R34.1 76.454,105.918 78.052,107.516 v1(107.823,107.516) ; v1(108.077,90.932) 108.331,91.186 110.363,91.186 112.141,89.408 112.141,85.979 107.061,80.899 107.061,78.359 112.522,72.898 112.522,66.079 111.975,65.532 U19.2
DC: J1.3 U3.3 | length 30.2
  Bottom Layer w0.5: U3.3 153.955,73.945 153.162,73.152 151.13,73.152 148.971,70.993 148.971,68.707 152.654,65.024 J1.3
DC_TFT: J8.5 U1.18 | length 74.9
  Bottom Layer w0.2: 70.866,87.943 71.234,87.575 77.195,87.575 77.239,87.575 77.289,87.525 U1.18
  Bottom Layer w0.5: J8.5 9.162,101.872 56.979,101.872 70.866,87.985
DD: J1.2 U3.4 | length 33.4
  Bottom Layer w0.5: U3.4 152.554,75.205 152.554,74.43 152.261,74.137 149.956,74.137 147.447,71.628 147.447,68.072 153.035,62.484 J1.2
DTR: R3.2 S2.1 U2.25 | length 20.2
  Top Layer w0.5: v1(116.332,109.728) v1(116.332,115.951)
  Bottom Layer w0.5: S2.1@112.014,115.817 116.198,115.817 v1(116.332,115.951) ; v1(116.332,109.728) 116.268,109.664 116.268,107.251 R3.2 117.602,107.188 119.634,105.156 121.737,105.156 121.792,105.211 U2.25
GND: C1.1 C2.1 C3.1 C4.1 C5.1 C6.1 C7.1 C8.1 C9.2 C10.1 C11.1 C12.1 C13.2 C14.2 C15.1 C16.1 C17.2 C18.2 C19.1 C20.2 C21.1 C22.1 C23.2 D4.2 D9.1 J1.4 J2.2 J3.3 J8.2 Q1.1 Q2.1 Q3.1 Q4.1 R2.2 R5.1 S1.1 S2.2 S3.1 S4.1 S5.2 S6.2 S7.2 S8.2 S9.2 U1.8 U1.23 U1.35 U1.47 U2.1 U2.15 U2.38 U2.39 U3.1 U6.2 U7.4 U9.2 U11.2 U12.3 U12.5 U12.6 U14.2 U16.1 U18.2 U19.4 | length 1051.9
  Top Layer w0.2: v1(114.173,49.911) 114.236,49.974 114.236,60.515 v1(114.3,60.579) ; v1(144.272,51.435) 144.145,51.562 144.145,66.421 v1@144.526,66.802
  Top Layer w0.5: v1(83.947,102.489) 84.01,102.552 84.01,116.086 v1(84.074,116.15) ; v1(144.018,66.929) 144.145,66.802 144.526,66.802 144.589,66.865 153.733,66.865 v1(153.797,66.802)
  Top Layer w1: v1@105.156,59.817 v1(105.156,64.643)
  Bottom Layer w0.2: C18.2 C18.2@4.699,107.442 ; C16.1@36.449,27.178 C16.1 ; C14.2 41.322,40.005 C14.2@41.822,39.505 ; C17.2 C17.2@43.307,31.67 ; C23.2@45.259,39.878 C23.2 ; 75.184,90.805 75.965,90.024 U1.23@77.27,90.024 ; U1.23@77.271,90.025 U1.23 79.901,90.025 ; 79.734,78.972 81.316,80.554 81.316,82.898 81.366,82.948 U1.8 81.366,86.99 ; C3.1 82.658,98.289 82.541,98.172 82.541,95.767 84.366,93.942 U1.35 84.366,89.99 ; 84.401,85.525 U1.47 86.943,85.525 86.993,85.475 88.896,85.475 89.154,85.217 ; C9.2 C9.2@91.079,75.777
  Bottom Layer w0.5: C2.1 72.38,98.298 71.755,97.673 71.755,94.234 75.184,90.805 ; 79.734,75.797 79.734,78.972 ; 79.901,90.025 82.151,87.775 ; 81.366,86.99 82.151,87.775 ; v1(84.074,116.15) 83.947,116.277 83.947,122.428 85.598,124.079 91.059,124.079 91.44,124.46 J2.2 91.44,128.397 92.456,129.413 103.251,129.413 104.295,128.369 ; 84.366,89.99 82.151,87.775 ; 84.401,85.525 82.151,87.775 ; S9.2@87.086,69.798 87.373,69.511 88.223,69.511 93.218,64.516 105.029,64.516 v1(105.156,64.643) 105.41,64.897 105.41,69.596 103.759,71.247 96.774,71.247 ; 89.154,85.217 91.313,83.058 C4.1 92.964,83.333 93.959,84.328 98.425,84.328 ; C9.2@91.079,75.777 91.079,73.461 93.292,71.247 96.774,71.247 ; U6.2 96.52,77.724 98.298,75.946 98.298,72.771 96.774,71.247 ; S2.2 107.047,120.41 104.394,123.063 J3.3 104.394,128.27 105.791,129.667 116.586,129.667 118.872,127.381 118.872,122.809 119.96,121.721 U2.38 127.453,121.721 129.282,119.892 129.282,116.984 U2.39@130.061,116.205 ; U2.39@132.559,115.542 U2.39@131.889,114.872 ; U2.39@133.731,116.205 U2.39@133.731,116.459 ; S3.1 138.518,88.265 138.811,87.972 138.811,76.112 138.518,75.819 S1.1 137.273,68.365 138.709,66.929 v1(144.018,66.929) ; C11.1 C10.1 146.558,117.449 146.558,119.761 144.598,121.721 U2.1 139.863,121.92 136.525,121.92 134.497,119.892 134.497,117.225 133.985,116.713 133.477,116.713 131.889,115.126 U2.39@131.889,114.872 ; C8.1 146.49,109.304 146.49,106.739 R2.2 146.431,106.405 143.862,103.837 U2.15 136.907,106.425 134.497,108.835 134.497,111.883 131.889,114.49 U2.39@131.889,114.872 ; C7.1 C7.1@153.692,69.298 ; v1(153.797,66.802) 153.733,66.865 153.733,69.256 C7.1@153.692,69.298 ; C1.1 156.537,93.78 157.291,93.78 157.584,93.487 157.584,85.829 153.416,81.661 153.416,79.502 156.43,76.488 156.43,75.668 156.495,75.603 U3.1 156.495,73.629 157.48,72.644 168.783,72.644 169.672,71.755 169.672,67.857 169.379,67.564 J1.4 164.592,67.564 162.814,69.342 156.53,69.342 C6.1 156.442,69.298 C7.1@153.692,69.298
  Bottom Layer w1: C18.2 5.969,107.315 6.477,106.807 6.477,89.281 3.81,86.614 3.81,82.55 3.81,52.324 6.223,49.911 13.208,49.911 ; C18.2@4.699,107.442 C19.1 6.361,110.225 7.112,109.474 J8.2 64.897,109.474 71.573,116.15 v1(84.074,116.15) ; S5.2@12.7,53.312 12.7,50.419 13.208,49.911 ; D9.1 17.907,7.112 19.558,5.461 34.29,5.461 ; S6.2@29.464,53.312 29.623,53.153 29.623,50.895 30.607,49.911 ; C15.1 36.195,46.228 39.751,49.784 39.751,49.911 ; C16.1@36.449,27.178 28.954,27.178 28.272,26.496 28.272,24.46 28.954,23.778 U12.5 31.222,19.324 33.02,17.526 33.02,6.731 34.29,5.461 ; C16.1 36.576,28.448 38.648,30.52 C17.2 ; C23.2@44.95,39.778 45.05,39.878 C23.2@45.259,39.878 ; S7.2@46.228,53.312 46.228,50.419 45.72,49.911 ; C20.2 59.617,22.025 43.053,5.461 34.29,5.461 ; 59.627,29.083 59.627,32.194 59.817,32.385 59.817,33.274 60.968,34.425 61.857,34.425 63.119,35.687 63.119,42.545 67.885,47.311 67.885,47.346 73.499,52.959 78.613,52.959 79.502,52.07 79.502,45.945 ; S8.2@62.992,53.312 62.992,50.497 62.406,49.911 45.72,49.911 ; Q4.1 70.675,40.092 75.527,40.092 U18.2 75.62,40.005 78.232,40.005 79.502,41.275 79.502,45.593 79.551,45.593 81.837,47.879 91.313,47.879 95.726,52.292 101.378,52.292 103.505,50.165 103.505,45.847 ; C5.1 79.734,75.797 C12.1 ; C3.1@83.896,98.339 83.896,102.438 v1(83.947,102.489) ; C13.2 84.759,75.747 84.832,75.747 84.832,74.426 87.086,72.172 S9.2@87.086,69.798 ; R5.1 97.083,90.86 98.395,92.172 D4.2 105.888,92.172 107.061,93.345 112.014,93.345 116.078,89.281 116.078,77.724 114.374,76.02 114.374,64.844 ; Q3.1 95.165,40.092 99.933,40.092 U14.2 102.74,40.002 103.505,40.767 103.505,45.847 ; 98.425,84.328 103.505,84.328 106.045,86.868 106.045,90.91 D4.2@104.783,92.172 ; S4.1 v1(105.283,59.69) 106.04,59.69 106.802,60.452 U19.4 ; U19.4@110.096,60.452 U19.4 ; v1(114.173,49.911) 114.173,48.006 ; v1(114.3,60.579) 114.374,60.653 114.374,63.066 ; 114.374,64.463 114.374,63.066 ; Q2.1 119.654,40.092 124.497,40.092 U11.2 127.251,40.002 128.397,41.148 128.397,45.847 ; Q1.1 148.461,40.259 148.718,40.002 U9.2 151.762,40.002 152.908,41.148 152.908,50.419 150.495,52.832 145.669,52.832 v1(144.272,51.435) ; v1@144.463,51.626 v1(144.272,51.435) ; C11.1 149.479,114.681 156.337,107.823 C1.1 ; 13.208,49.911 30.607,49.911 ; 30.607,49.911 39.751,49.911 ; 39.751,49.911 45.72,49.911 ; 103.505,45.847 105.664,48.006 114.173,48.006 ; U19.4 109.986,60.456 111.764,60.456 114.374,63.066 ; 114.173,48.006 116.713,48.006 121.031,52.324 125.73,52.324 128.397,49.657 128.397,45.847 ; 128.397,45.847 130.556,48.006 140.843,48.006 v1(144.272,51.435)
LED_BLUE: R14.1 U1.46 | length 6.8
  Bottom Layer w0.2: U1.46 89.743,86.025 90.122,85.646 R14.1
LED_GREEN: R12.1 U1.45 | length 7.4
  Bottom Layer w0.2: U1.45 89.954,86.525 91.694,88.265 92.835,88.265 R12.1
LED_RED: R11.1 U1.43 | length 11.3
  Bottom Layer w0.2: U1.43 89.141,87.525 90.678,89.062 90.678,92.71 91.44,93.472 R11.1
LED_TFT: R29.2 U1.14 | length 19.3
  Bottom Layer w0.2: 67.129,85.525 U1.14
  Bottom Layer w0.5: R29.2 62.738,89.916 67.129,85.525
NetD4_1: D4.1 R11.2 | length 9.2
  Bottom Layer w0.5: R11.2 D4.1
NetD4_3: D4.3 R12.2 | length 10.3
  Bottom Layer w0.5: R12.2 94.656,88.265 96.647,88.265 99.254,90.872 D4.3
NetD4_4: D4.4 R14.2 | length 10.9
  Bottom Layer w0.5: R14.2 96.187,85.646 100.113,89.572 D4.4
NetD5_1: D5.1 R16.1 | length 6.3
  Bottom Layer w0.5: D5.1 137.414,24.003 R16.1
NetD5_2: D5.2 D6.1 Q1.3 U8.2 | length 18.1
  Bottom Layer w0.5: D5.2 140.028,26.469 143.888,26.469 U8.2 144.008,26.441 144.008,35.133 Q1.3 144.244,35.369 148.896,35.369 D6.1
NetD7_1: D7.1 R21.1 | length 6.2
  Bottom Layer w0.5: D7.1 112.945,23.961 R21.1
NetD7_2: D7.2 D8.1 Q2.3 U10.2 | length 22.1
  Bottom Layer w0.5: U10.2@118.873,26.498 115.664,26.498 D7.2 115.664,26.319 118.873,26.319 U10.2@119.252,26.319 ; U10.2@119.132,26.439 U10.2 Q2.3@119.43,35.351 ; Q2.3 119.789,35.328 124.355,35.328 D8.1
NetD9_2: D9.2 I1.1 U12.2 | length 27.3
  Bottom Layer w0.2: D9.2 D9.2@22.602,18.161 ; I1.1@27.643,13.462 I1.1
  Bottom Layer w0.5: 26.416,22.225 26.43,22.239
  Bottom Layer w0.8: D9.2 22.207,15.385 24.13,13.462 I1.1@27.643,13.462 ; D9.2@22.602,18.161 24.257,18.161 26.416,20.32 26.416,22.225 ; 26.43,22.239 26.43,27.954 27.354,28.878 U12.2
NetD10_1: D10.1 R26.1 | length 6.2
  Bottom Layer w0.5: D10.1 88.477,23.918 R26.1
NetD10_2: D10.2 D11.1 Q3.3 U13.2 | length 17.9
  Bottom Layer w0.5: D10.2 91.068,26.446 94.91,26.446 U13.2 95.018,26.451 Q3.3@95.018,35.046 ; Q3.3@95.018,35.103 Q3.3@95.018,35.046 ; D11.1 99.791,35.328 95.299,35.328 Q3.3 Q3.3@95.018,35.046
NetD12_1: D12.1 R31.1 | length 6.2
  Bottom Layer w0.5: D12.1 64.008,23.876 R31.1
NetD12_2: D12.2 D13.1 Q4.3 U17.2 | length 18
  Bottom Layer w0.5: D12.2 66.599,26.446 70.42,26.446 U17.2 70.528,26.451 Q4.3@70.528,35.046 ; Q4.3@70.528,35.075 Q4.3@70.528,35.046 ; Q4.3 71.334,35.102 71.792,35.56 D13.1 ; Q4.3 Q4.3@70.528,35.046
NetF1_1: F1.1 J4.2
NetF1_2: F1.2 U7.2
NetJ2_1: J2.1 R8.2 | length 34.5
  Top Layer w0.5: v1(81.28,102.489) 81.343,102.552 81.343,119.189 v1(81.407,119.253)
  Bottom Layer w0.5: R8.2 v1(81.28,102.489) ; v1(81.407,119.253) 81.28,119.38 81.28,123.825 84.074,126.619 J2.1
NetJ2_3: J2.3 R10.2 | length 35.9
  Top Layer w0.5: v1(94.043,116.15) 94.17,116.023 94.17,100.901 v1(94.234,100.838)
  Bottom Layer w0.5: R10.2 86.36,99.924 87.274,100.838 v1(94.234,100.838) ; J2.3 94.012,126.587 94.012,116.182 v1(94.043,116.15)
NetJ4_1: J4.1 U7.1
NetJ5_1: J5.1 U8.4
NetJ5_2: J5.2 U8.3
NetJ5_3: J5.3 U8.5
NetJ6_1: J6.1 U10.4
NetJ6_2: J6.2 U10.3
NetJ6_3: J6.3 U10.5
NetJ7_1: J7.1 U13.4
NetJ7_2: J7.2 U13.3
NetJ7_3: J7.3 U13.5
NetJ9_1: J9.1 U17.4
NetJ9_2: J9.2 U17.3
NetJ9_3: J9.3 U17.5
NetQ1_2: Q1.2 R18.2 | length 15.4
  Bottom Layer w0.5: Q1.2 142.24,37.719 141.224,38.735 141.224,44.577 142.367,45.72 R18.2
NetQ2_2: Q2.2 R24.2 | length 16
  Bottom Layer w0.5: Q2.2 119.541,37.666 117.909,37.666 116.332,39.243 116.332,44.45 117.602,45.72 R24.2
NetQ3_2: Q3.2 R28.2 | length 15.5
  Bottom Layer w0.5: Q3.2 95.062,37.655 93.409,37.655 92.075,38.989 92.075,44.45 93.345,45.72 R28.2
NetQ4_2: Q4.2 R33.2 | length 16.3
  Bottom Layer w0.5: Q4.2 68.783,37.643 67.183,39.243 67.183,44.323 68.58,45.72 R33.2
NetR2_1: R2.1 U2.14 | length 5.3
  Bottom Layer w0.5: U2.14 143.437,105.211 144.631,106.405 R2.1
NetR6_1: R6.1 U2.23 | length 14.4
  Bottom Layer w0.5: R6.1 116.244,104.874 116.244,103.72 118.491,101.473 125.73,101.473 126.747,102.49 U2.23
NetR13_2: R13.2 U6.1 | length 2.9
  Bottom Layer w0.2: U6.1 94.107,77.978 94.764,78.635 R13.2
  Bottom Layer w0.5: U6.1 U6.1@94.175,77.792 ; R13.2 R13.2@94.852,80.049
NetR17_2: R17.2 U9.1 | length 14
  Bottom Layer w0.5: R17.2@146.433,50.292 150.368,50.292 151.384,49.276 151.384,43.18 150.746,42.542 U9.1
NetR18_1: R18.1 U9.3 | length 9
  Bottom Layer w0.5: U9.3 155.324,40.002 154.559,40.767 154.559,44.704 155.409,45.554 156.552,45.554 R18.1
NetR23_2: R23.2 U11.1 | length 13.8
  Bottom Layer w0.5: R23.2@122.026,50.292 125.603,50.292 126.873,49.022 126.873,43.18 126.235,42.542 U11.1
NetR24_1: R24.1 U11.3 | length 9.4
  Bottom Layer w0.5: U11.3 130.686,40.002 129.921,40.767 129.921,44.831 130.81,45.72 R24.1
NetR27_2: R27.2 U14.1 | length 13.2
  Bottom Layer w0.5: R27.2@98.08,50.292 101.092,50.292 102.235,49.149 102.235,42.926 101.851,42.542 U14.1
NetR28_1: R28.1 U14.3 | length 10.6
  Bottom Layer w0.5: U14.3 105.667,40.002 104.775,40.894 104.775,45.085 105.41,45.72 R28.1
NetR29_1: R29.1 R30.2 U15.G | length 5.5
  Bottom Layer w0.2: U15.G U15.G@57.155,90.231 ; R30.2@58.779,86.498 R30.2
  Bottom Layer w0.5: U15.G@57.155,90.231 58.579,90.231 58.779,90.031 R30.2@58.779,86.498
NetR32_2: R32.2 U18.1 | length 13
  Bottom Layer w0.5: R32.2 76.708,50.292 77.724,49.276 77.724,43.053 77.213,42.542 U18.1
NetR33_1: R33.1 U18.3 | length 9.5
  Bottom Layer w0.5: U18.3 81.791,40.002 81.153,40.64 81.153,45.427 81.446,45.72 R33.1
NetU5_2: U5.2 U6.3 | length 25.9
  Top Layer w0.5: v1(94.996,73.152) 95.123,73.025 108.458,73.025 v1(108.585,72.898)
  Bottom Layer w0.5: v1(94.996,73.152) U6.3 ; U5.2 103.34,80.048 103.34,78.651 108.298,73.693 108.298,73.185 v1(108.585,72.898)
OSC_IN: C9.1 R9.1 U1.5 U4.2 | length 32.2
  Bottom Layer w0.2: U1.5 82.866,80.329 83.82,79.375 87.376,79.375 87.867,78.884 R9.1
  Bottom Layer w0.5: R9.1 87.925,77.54 C9.1@90.727,77.54 ; C9.1 90.784,77.597 C9.1@90.727,77.54 ; U4.2 98.933,70.231 92.583,70.231 89.662,73.152 89.662,76.475 C9.1@90.727,77.54
OSC_OUT: C13.1 R9.2 U1.6 U4.1 | length 25
  Bottom Layer w0.2: U1.6 82.366,79.559 83.978,77.947 84.359,77.947 C13.1
  Bottom Layer w0.5: C13.1 85.952,77.597 86.36,77.189 86.36,75.975 86.653,75.682 R9.2 87.867,73.042 92.964,67.945 U4.1
RESET_SYSTEM: D1.2 D2.2 D3.2 R25.2 S9.1 | length 119
  Top Layer w0.5: v1(116.332,73.025) 116.459,73.152 134.112,73.152 v1(134.239,73.279)
  Bottom Layer w0.5: R25.2 72.39,72.39 72.898,71.882 76.581,71.882 78.486,69.977 78.486,65.151 80.339,63.298 82.586,63.298 82.586,58.765 84.506,56.845 85.871,56.845 85.904,56.812 100.532,56.812 100.565,56.845 113.741,56.845 116.459,59.563 116.459,72.898 v1(116.332,73.025) ; S9.1@82.586,69.798 82.697,69.687 82.697,68.434 85.598,65.532 88.265,65.532 89.102,64.695 89.102,59.751 D3.2 ; v1(134.239,73.279) 134.239,79.121 134.817,79.699 136.397,79.699 D1.2 136.617,79.919 D2.2
RESET_TFT: J8.4 U1.19 | length 75.7
  Bottom Layer w0.2: 71.755,88.519 72.199,88.075 77.195,88.075 77.239,88.075 77.289,88.025 U1.19
  Bottom Layer w0.5: J8.4 9.162,104.412 55.862,104.412 71.755,88.519
Role_1: R17.1 U1.39 | length 116.8
  Bottom Layer w0.2: U1.39 87.62,89.525 88.138,90.043 88.138,96.266 88.265,96.393
  Bottom Layer w0.5: 88.265,96.393 90.879,99.007 113.591,99.007 127,85.598 127,56.007 127.762,55.245 153.797,55.245 156.706,52.336 R17.1
Role_2: R23.1 U1.40 | length 91
  Bottom Layer w0.2: U1.40 87.755,89.025 88.9,90.17 88.9,95.504 89.281,95.885
  Bottom Layer w0.5: 89.281,95.885 91.313,97.917 113.03,97.917 124.841,86.106 124.841,54.991 126.176,53.656 129.224,53.656 132.207,50.673 R23.1
Role_3: R27.1 U1.41 | length 94.9
  Bottom Layer w0.2: U1.41 88.144,88.525 89.535,89.916 89.535,94.615 90.17,95.25
  Bottom Layer w0.5: 90.17,95.25 91.694,96.774 112.395,96.774 123.063,86.106 123.063,56.769 118.618,52.324 109.675,52.324 R27.1
Role_4: R32.1 U1.42 | length 113.8
  Bottom Layer w0.2: U1.42 88.533,88.025 90.17,89.662 90.17,93.726 90.906,94.462
  Bottom Layer w0.5: R32.1 86.614,53.594 117.475,53.594 121.158,57.277 121.158,86.36 112.395,95.123 91.567,95.123 90.906,94.462
RS_ESP32: C8.2 D2.1 R4.1 S3.2 U2.3 | length 42.6
  Top Layer w0.5: v1(142.494,91.186) v1(142.494,109.347)
  Bottom Layer w0.5: U2.3 141.931,119.181 142.748,118.364 142.748,112.903 143.648,112.003 R4.1 144.69,111.944 144.69,109.422 C8.2 144.741,109.355 142.502,109.355 v1(142.494,109.347) ; D2.1 141.367,83.838 141.992,84.463 141.992,84.913 142,84.921 142,88.4 143.072,89.472 143.072,90.202 142.494,90.78 v1(142.494,91.186)
RS_STM: C12.2 D3.1 R7.1 S4.2 U1.7 | length 46.4
  Bottom Layer w0.2: C12.2 81.28,79.571 81.816,80.107 81.816,82.898 81.866,82.948 U1.7
  Bottom Layer w0.5: R7.1 75.311,74.588 75.604,74.295 81.28,74.295 82.696,72.879 82.931,72.644 ; C12.2 81.392,77.485 82.638,77.485 82.931,77.192 82.931,72.644 ; S4.2 D3.1 93.283,59.87 93.283,62.292 88.773,66.802 86.233,66.802 84.582,68.453 84.582,70.993 82.931,72.644
RS_ZB: C1.2 D1.1 J1.1 R1.1 S1.2 U3.24 | length 67.8
  Bottom Layer w0.5: D1.1 141.248,79.901 141.873,79.276 S1.2 ; R1.1 153.997,93.791 154.451,93.791 156.062,92.18 C1.2 156.495,92.022 156.495,86.01 146.304,75.819 S1.2 ; J1.1 153.924,59.944 141.873,71.995 S1.2
RXD: J3.1 U2.34 | length 19.6
  Bottom Layer w0.5: J3.1 113.538,126.619 115.951,124.206 115.951,119.634 118.944,116.641 U2.34
SCK: J8.7 U1.15 | length 73.4
  Bottom Layer w0.2: 69.352,86.223 69.55,86.025 U1.15
  Bottom Layer w0.5: J8.7 9.162,96.792 58.783,96.792 69.352,86.223
SDI(MOSI): J8.6 U1.17 | length 74
  Bottom Layer w0.2: 69.977,87.503 70.405,87.075 77.195,87.075 77.239,87.075 77.289,87.025 U1.17
  Bottom Layer w0.5: J8.6 9.162,99.332 58.148,99.332 69.977,87.503
SWCLK: R10.1 U1.37 | length 6
  Bottom Layer w0.2: U1.37 86.314,90.525 86.36,90.571 86.36,91.694
  Bottom Layer w0.5: 86.36,91.694 R10.1
SWDIO: R8.1 U1.34 | length 5.6
  Bottom Layer w0.2: R8.1 81.3,96.351 81.3,95.738 83.866,93.172 U1.34
TFT_LED: J8.8 U15.D | length 47.8
  Bottom Layer w0.5: J8.8 9.162,94.252 48.133,94.252 48.877,94.252 53.848,89.281 U15.D
TXD: J3.2 U2.35 | length 25
  Bottom Layer w0.5: J3.2 106.973,126.658 106.973,128.055 107.442,128.524 114.935,128.524 117.348,126.111 117.348,120.142 119.761,117.729 122.13,117.729 U2.35
UART1_STM_RX: U1.31 U3.20 | length 93.6
  Bottom Layer w0.2: 79.502,101.346 79.502,95.631 79.883,95.25 80.899,95.25 82.366,93.783 U1.31
  Bottom Layer w0.5: 79.502,101.346 79.502,103.759 80.317,104.574 109.802,104.574 121.213,93.163 148.899,93.163 151.415,90.647 U3.20
UART1_STM_TX: U1.30 U3.21 | length 97.9
  Bottom Layer w0.2: 78.613,99.695 78.613,95.631 79.502,94.742 80.645,94.742 81.866,93.521 U1.30
  Bottom Layer w0.5: 78.613,99.695 78.613,104.902 79.576,105.865 110.289,105.865 121.412,94.742 148.844,94.742 152.685,90.901 U3.21
UART3_STM_RX: U1.22 U2.30 | length 79
  Bottom Layer w0.2: 74.486,90.107 75.067,89.525 U1.22
  Bottom Layer w0.5: 74.486,90.107 69.85,94.742 69.85,109.474 73.478,113.102 113.72,113.102 115.298,111.524 U2.30@121.613,111.524
UART3_STM_TX: U1.21 U2.31 | length 83.2
  Bottom Layer w0.2: 73.533,89.535 74.043,89.025 U1.21
  Bottom Layer w0.5: 73.533,89.535 68.58,94.488 68.58,110.363 72.517,114.3 114.554,114.3 115.933,112.921 U2.31@121.74,112.921 ; U2.31@122.185,112.958 U2.31
pads on no net: U1.1 U1.3 U1.4 U1.16 U1.25 U1.26 U1.27 U1.28 U1.32 U1.33 U1.38 U2.4 U2.5 U2.6 U2.7 U2.8 U2.9 U2.10 U2.11 U2.12 U2.13 U2.16 U2.17 U2.18 U2.19 U2.20 U2.21 U2.22 U2.24 U2.26 U2.27 U2.28 U2.29 U2.32 U2.33 U2.36 U2.37 U3.5 U3.6 U3.7 U3.8 U3.9 U3.10 U3.11 U3.12 U3.13 U3.14 U3.15 U3.16 U3.17 U3.18 U3.19 U3.22 U3.23 U19.3
copper on no net: | length 600
  Top Layer w0.254: 0,0 170,0 170,130 0,130 0,0

## Polygon pours and split planes (outlines as drawn)
GND on Bottom Layer "GND_L02_P000" (solid, remove dead copper, pour order 0): 170.053,130.048 0,130.048 0,0 170.053,0

## Keep-outs
Bottom Layer:
  region: 140.97,123.19 140.97,129.667 121.666,129.667 121.666,123.19
  rectangle: 158.623,74.168 169.291,89.789

## Other copper
Bottom Layer:
  rectangle net GND: 35.56,26.543 37.465,29.21
  rectangle net GND: 35.56,28.448 40.64,31.242
  rectangle net GND: 39.878,28.575 48.387,37.592
  rectangle net +3.3: 49.276,42.037 52.07,45.847
  rectangle net +3.3: 49.276,36.449 61.341,43.561
  rectangle net +5: 41.783,23.241 53.594,27.813
  rectangle net GND: 57.785,23.241 61.468,34.925
  rectangle net +5: 53.467,23.241 57.15,34.925
  rectangle net NetJ9_3: 68.961,1.016 73.279,16.129
  rectangle net NetF1_2: 3.302,38.481 9.271,46.863
  region net NetJ4_1: 15.113,11.938 15.113,16.383 3.175,16.383 3.175,11.938
  region net NetJ4_1: 20.32,34.925 20.32,39.878 10.795,39.878 10.795,34.925
  rectangle net NetJ4_1: 10.795,11.938 15.113,39.243
  rectangle net NetF1_1: 3.556,17.526 9.017,31.623
  rectangle net GND: 16.256,16.891 19.685,22.479
  rectangle net GND: 129.032,111.506 134.747,117.475
  rectangle net NetJ9_2: 74.422,1.143 78.613,29.845
  rectangle net NetJ9_1: 79.756,1.016 84.201,16.002
  rectangle net NetJ7_3: 93.472,1.016 97.917,16.002
  rectangle net NetJ7_2: 98.806,0.889 102.997,29.718
  rectangle net NetJ7_1: 104.267,1.016 108.712,16.002